# EAGLE board JTAGKey_V1 (EAGLE 5.11)
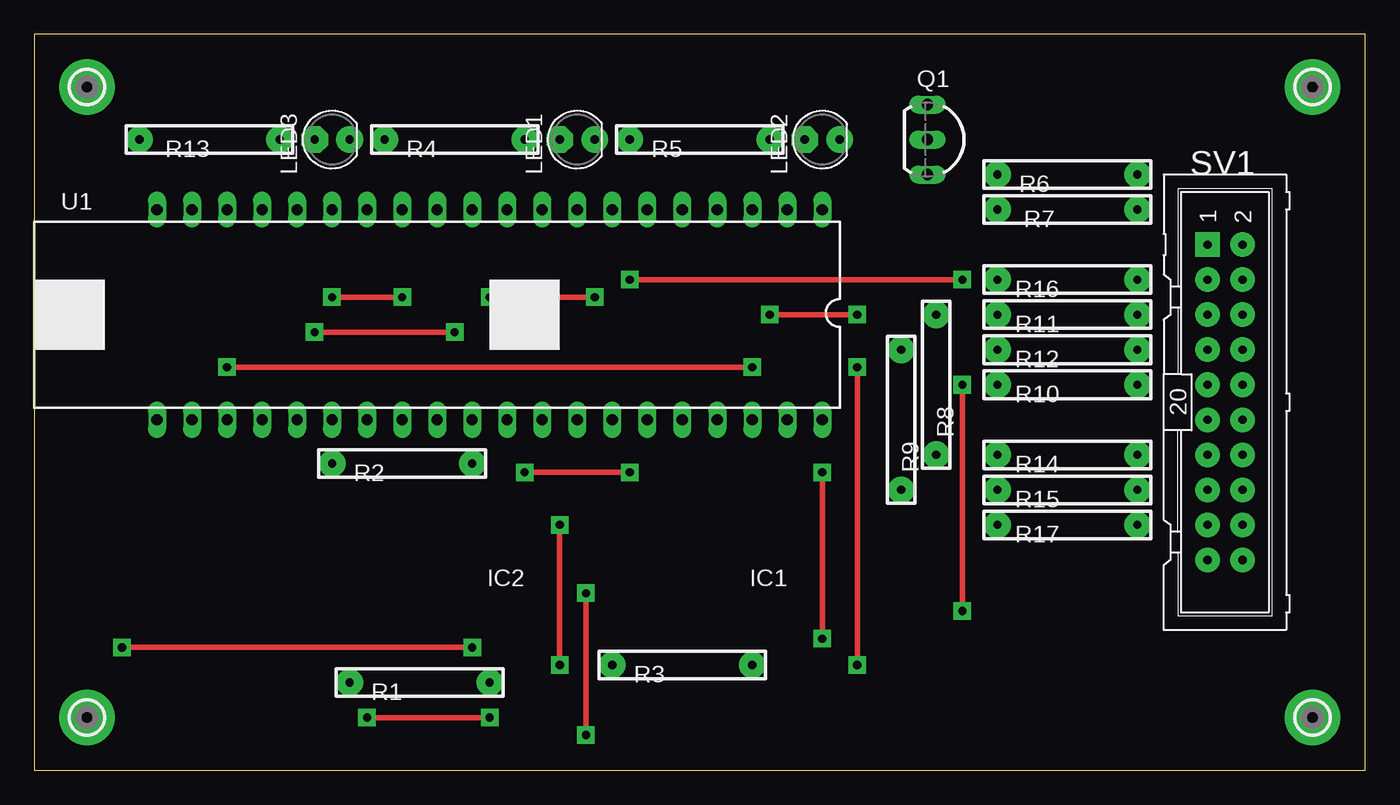
[diagram p0: board, top side]
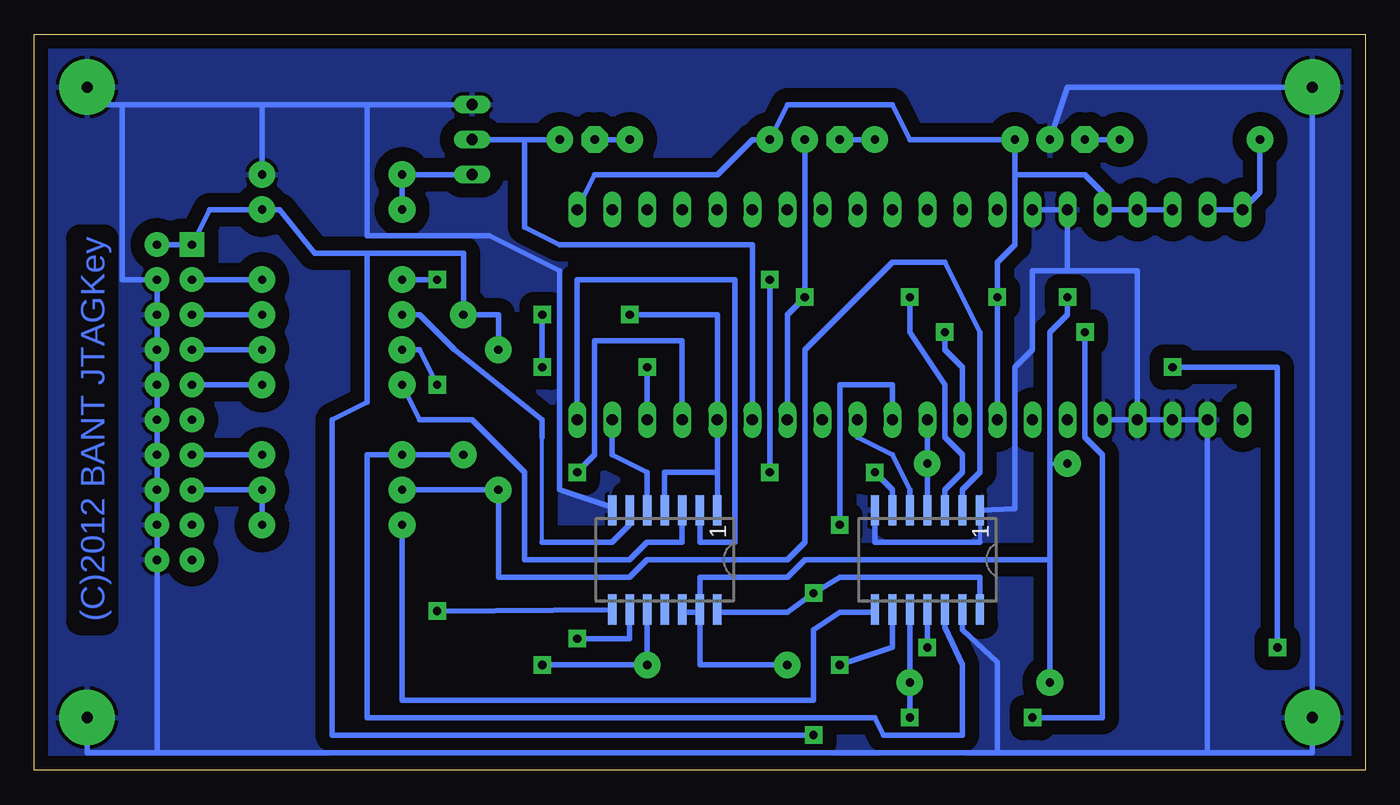
[diagram p1: board, bottom side, seen from below]

Size 96.52 x 53.34 mm. Coordinates in mm from the lower left corner, seen from the top.
Outline: 0,0 96.52,0 96.52,53.34 0,53.34 0,0
Copper layers (1*16): Top 0.035mm / dielectric 1.5mm / Bottom 0.035mm
Design rules "default": minimum track width 10mil, minimum drill 24mil, track to track 8mil, track to pad 8mil, pad to pad 8mil, via to via 8mil, smd to smd 8mil, copper to edge 40mil, drill to drill 8mil, minimum pad ring 10mil, minimum via ring 8mil, stop-mask expansion 4mil, vias tented up to drill 0mil, thermal gap 10mil

## Footprints (pad centres in the part's own frame; a part is rotated, then mirrored left to right if it is on the bottom)
SOP14 = smd 0.6 x 2.2: 1 -3.175,-3.6; 2 -1.905,-3.6; 3 -0.635,-3.6; 4 0.635,-3.6; 5 1.905,-3.6; 6 3.175,-3.6; 7 4.445,-3.6; 8 4.445,3.6; 9 3.175,3.6; 10 1.905,3.6; 11 0.635,3.6; 12 -0.635,3.6; 13 -1.905,3.6; 14 -3.175,3.6
LED_3MM_VIRT_2 = drill 0.6 pad 1.93 octagon: A 0,1.27 | drill 0.6 pad 1.93 round: K 0,-1.27
PAD-2.1 = drill 0.8 pad 4 round: B2,1 0,0
TO92 = drill 0.813 long: B 2.54,0; C 0,0; E -2.54,0
R_0.125W_4 = drill 0.6 pad 1.93 round: 1 -5.08,0; 2 5.08,0
ML20W = drill 0.6 pad 1.778 square: 1 -11.43,-1.27 | drill 0.6 pad 1.778 round: 2 -11.43,1.27; 3 -8.89,-1.27; 4 -8.89,1.27; 5 -6.35,-1.27; 6 -6.35,1.27; 7 -3.81,-1.27; 8 -3.81,1.27; 9 -1.27,-1.27; 10 -1.27,1.27; 11 1.27,-1.27; 12 1.27,1.27; 13 3.81,-1.27; 14 3.81,1.27; 15 6.35,-1.27; 16 6.35,1.27; 17 8.89,-1.27; 18 8.89,1.27; 19 11.43,-1.27; 20 11.43,1.27
DIL40-AE-FT2232 = drill 0.813 long: 1 -24.13,-7.62; 2 -21.59,-7.62; 3 -19.05,-7.62; 4 -16.51,-7.62; 5 -13.97,-7.62; 6 -11.43,-7.62; 7 -8.89,-7.62; 8 -6.35,-7.62; 9 -3.81,-7.62; 10 -1.27,-7.62; 11 1.27,-7.62; 12 3.81,-7.62; 13 6.35,-7.62; 14 8.89,-7.62; 15 11.43,-7.62; 16 13.97,-7.62; 17 16.51,-7.62; 18 19.05,-7.62; 19 21.59,-7.62; 20 24.13,-7.62; 21 24.13,7.62; 22 21.59,7.62; 23 19.05,7.62; 24 16.51,7.62; 25 13.97,7.62; 26 11.43,7.62; 27 8.89,7.62; 28 6.35,7.62; 29 3.81,7.62; 30 1.27,7.62; 31 -1.27,7.62; 32 -3.81,7.62; 33 -6.35,7.62; 34 -8.89,7.62; 35 -11.43,7.62; 36 -13.97,7.62; 37 -16.51,7.62; 38 -19.05,7.62; 39 -21.59,7.62; 40 -24.13,7.62

## Placement (x,y rotation side)
IC1  74VHC125  [SOP14]  50.16,15.24 180 bottom
IC2  74VHC125  [SOP14]  31.11,15.24 180 bottom
LED1  YELLOW  [LED_3MM_VIRT_2]  39.37,45.72 90 top
LED2  GREEN  [LED_3MM_VIRT_2]  57.15,45.72 90 top
LED3  RED  [LED_3MM_VIRT_2]  21.59,45.72 90 top
MT1  MOUNT11  [PAD-2.1]  3.81,3.81 0 top
MT2  MOUNT2  [PAD-2.1]  92.71,3.81 0 top
MT3  MOUNT3  [PAD-2.1]  92.71,49.53 0 top
MT4  MOUNT4  [PAD-2.1]  3.81,49.53 0 top
Q1  2SC1815  [TO92]  64.77,45.72 270 top
R1  22K  [R_0.125W_4]  27.94,6.35 180 top
R2  22K  [R_0.125W_4]  26.67,22.23 180 top
R3  22K  [R_0.125W_4]  46.99,7.62 180 top
R4  1K  [R_0.125W_4]  30.48,45.72 180 top
R5  1K  [R_0.125W_4]  48.26,45.72 180 top
R6  22K  [R_0.125W_4]  74.93,43.18 180 top
R7  15K  [R_0.125W_4]  74.93,40.64 0 top
R8  22K  [R_0.125W_4]  65.41,27.94 90 top
R9  22K  [R_0.125W_4]  62.87,25.4 90 top
R10  82  [R_0.125W_4]  74.93,27.94 0 top
R11  82  [R_0.125W_4]  74.93,33.02 0 top
R12  82  [R_0.125W_4]  74.93,30.48 0 top
R13  1K  [R_0.125W_4]  12.7,45.72 180 top
R14  82  [R_0.125W_4]  74.93,22.86 0 top
R15  82  [R_0.125W_4]  74.93,20.32 0 top
R16  82  [R_0.125W_4]  74.93,35.56 0 top
R17  82  [R_0.125W_4]  74.93,17.78 0 top
SV1  JTAG  [ML20W]  86.36,26.67 270 top
U1  AE-FT2232  [DIL40-AE-FT2232]  33.02,33.02 180 top

## Library data of the parts
IC1 IC2 = ic74xx
LED1-LED3 MT1-MT4 Q1 R1-R17 = MyLib
SV1 = con-harting-ml
U1 = akizuki

## Nets
GND: IC1.7 IC2.1 IC2.7 IC2.13 LED3.K MT1.B2,1 MT2.B2,1 MT3.B2,1 MT4.B2,1 Q1.E R6.1 SV1.4 SV1.6 SV1.8 SV1.10 SV1.12 SV1.14 SV1.16 SV1.18 SV1.20 U1.14 U1.15 U1.22 U1.23 U1.24 U1.25
N$1: Q1.B R6.2 R7.1
N$2: R13.2 U1.19 U1.20
N$3: IC2.5 U1.32
N$4: LED3.A R13.1
N$5: IC1.3 R10.1
N$6: IC1.6 R11.1
N$7: IC1.8 R12.1
N$8: IC2.12 R8.1 R14.1
N$9: IC2.2 R9.1 R15.1
N$10: IC2.6 R16.1
N$11: IC2.9 U1.31
N$12: IC2.8 R17.1
N$13: LED1.A R4.1
N$14: LED2.A R5.1
N$15: IC2.4 R2.1 U1.30
N$16: IC2.10 R1.1 U1.29
N$17: R10.2 SV1.9
N$18: R11.2 SV1.5
N$19: R12.2 SV1.7
N$20: R14.2 SV1.13
N$21: R15.2 R17.2 SV1.15
N$22: R16.2 SV1.3
NOE: IC1.1 IC1.4 IC1.10 R3.1 U1.36
NSRST_IN: IC2.3 LED1.K U1.34
NTVCC: LED2.K Q1.C U1.35
TCK: IC1.2 U1.40
TDI: IC1.5 U1.39
TDO: IC2.11 U1.38
TMS: IC1.9 U1.37
VCC: IC1.14 IC2.14 R7.2 R8.2 R9.2 SV1.1 SV1.2
VCCUSB: U1.21
VDD: IC1.12 IC1.13 R1.2 R2.2 R3.2 R4.2 R5.2 U1.1 U1.16 U1.17 U1.18 U1.28

## Tracks (layer width: path | path; a pad name or v marks a point on that pad's centre or on a via)
GND
  Bottom 0.254: IC2.13 29.21,11.43 | 54.61,19.05 IC1.7
  Bottom 0.305: IC2.1 27.94,16.51
  Bottom 0.406: LED3.K 21.59,49.53 MT4.B2,1 MT1.B2,1 3.81,1.27 11.43,1.27 | U1.24 U1.23 U1.22 11.43,1.27 | U1.14 U1.15 21.59,36.2 | U1.24 16.51,36.2 21.59,36.2 | IC2.1 25.4,18.95 25.4,29.21 24.13,30.48 24.13,36.2 21.59,36.2 | 27.94,16.51 35.56,16.51 IC2.7 | U1.24 U1.25 | 26.67,1.27 26.67,7.83 29.21,10.16 IC2.13 | 11.43,1.27 87.63,1.27 | 87.63,1.27 92.71,1.27 MT2.B2,1 | MT3.B2,1 92.71,48.26 90.17,48.26 | 80.01,48.26 R6.1 | 80.01,48.26 72.39,48.26 | 72.39,48.26 Q1.E | 54.61,19.05 58.42,20.32 58.42,36.2 63.5,38.73 72.39,38.73 72.39,48.26 | 90.17,48.26 80.01,48.26 | 90.17,48.26 90.17,35.56 SV1.4 SV1.6 SV1.8 SV1.10 SV1.12 SV1.14 SV1.16 SV1.18 SV1.20 87.63,1.27
  pour Bottom (isolate 1.016): 0,53.34 0,0 96.52,0 96.52,2.54 96.52,53.34
N$1
  Bottom 0.406: R7.1 R6.2 Q1.B
N$2
  Bottom 0.406: U1.19 U1.20 7.62,41.91 R13.2
N$3
  Bottom 0.254: IC2.5 33.02,19.05
  Bottom 0.406: 33.02,19.05 33.02,20.32 34.29,22.86 36.83,24.13 U1.32
N$4
  Bottom 0.406: R13.1 LED3.A
N$5
  Bottom 0.406: IC1.3 49.53,16.51 52.07,16.51 53.34,15.24 60.96,15.24 60.96,21.59 64.77,25.4 68.58,25.4 R10.1
N$6
  Bottom 0.305: 53.34,17.78 IC1.6 | 59.69,16.51 59.69,24.13
  Bottom 0.406: 53.34,17.78 54.61,16.51 59.69,16.51 | 59.69,24.13 59.69,25.4 66.04,30.48 68.58,33.02 R11.1
N$7  (via drill 0.6 pad 1.27)
  Top 0.406: v67.31,11.53 v67.31,27.94
  Bottom 0.406: IC1.8 v67.31,11.53 | v67.31,27.94 68.58,30.48 R12.1
N$8
  Bottom 0.406: IC2.12 30.48,10.37 29.21,7.62 29.21,6.35 29.21,2.54 34.92,2.54 35.56,3.81 72.39,3.81 72.39,22.86 R14.1 R8.1
N$9
  Bottom 0.305: IC2.2 29.21,19.05
  Bottom 0.406: 29.21,19.05 29.21,20.32 27.94,21.59 27.94,31.75 30.48,36.83 34.29,36.83 40.64,30.48 40.64,16.51 41.91,15.24 52.07,15.24 53.34,13.97 62.87,13.97 R9.1 R15.1
N$10  (via drill 0.6 pad 1.27)
  Top 0.406: v35.56,21.59 v43.18,21.59 | v43.18,35.56 v67.31,35.56
  Bottom 0.406: IC2.6 34.29,20.32 v35.56,21.59 | v43.18,21.59 v43.18,35.56 | v67.31,35.56 R16.1
N$11  (via drill 0.6 pad 1.27)
  Top 0.406: v38.1,7.62 v38.1,17.78
  Bottom 0.406: U1.31 34.29,27.94 38.1,27.94 v38.1,17.78 | v38.1,7.62 34.29,8.89 IC2.9
N$12
  Bottom 0.254: 35.56,11.43 IC2.8
  Bottom 0.406: 35.56,11.43 38.1,11.43 40.01,10.16 40.01,5.08 69.85,5.08 R17.1
N$13
  Bottom 0.406: R4.1 LED1.A
N$14
  Bottom 0.406: R5.1 LED2.A
N$15
  Bottom 0.406: IC2.4 R2.1 U1.30
N$16  (via drill 0.6 pad 1.27)
  Top 0.406: v20.32,31.75 v30.48,31.75 | v24.13,3.81 v33.02,3.81
  Bottom 0.406: IC2.10 R1.1 v33.02,3.81 | v30.48,31.75 30.48,30.48 29.21,29.21 U1.29 | v20.32,31.75 20.32,24.13 19.05,22.86 19.05,3.81 v24.13,3.81
N$17
  Bottom 0.406: R10.2 SV1.9
N$18
  Bottom 0.406: R11.2 SV1.5
N$19
  Bottom 0.406: R12.2 SV1.7
N$20
  Bottom 0.406: R14.2 SV1.13
N$21
  Bottom 0.406: SV1.15 R15.2 R17.2
N$22
  Bottom 0.406: R16.2 SV1.3
NOE  (via drill 0.6 pad 1.27)
  Top 0.406: v59.69,33.02 v53.34,33.02 | v59.69,7.62 v59.69,29.21
  Bottom 0.406: 46.99,21.59 IC1.1 | 46.99,21.59 50.8,21.59 IC1.4 | IC1.10 R3.1 v59.69,7.62 | v59.69,29.21 v59.69,33.02 | v53.34,33.02 46.99,33.02 U1.36 46.99,21.59
NSRST_IN  (via drill 0.6 pad 1.27)
  Top 0.406: v33.02,34.29 v40.64,34.29
  Bottom 0.305: IC2.3 30.48,19.05
  Bottom 0.406: U1.34 41.91,33.02 v40.64,34.29 LED1.K | 30.48,19.05 30.48,20.32 29.21,21.59 29.21,22.86 30.48,24.13 30.48,27.94 33.02,31.75 v33.02,34.29
NTVCC
  Bottom 0.406: U1.35 44.45,38.1 58.42,38.1 60.96,39.37 60.96,45.72 | 60.96,45.72 LED2.K | 60.96,45.72 Q1.C
TCK
  Bottom 0.406: U1.40 57.15,35.56 45.72,35.56 45.72,16.51 48.26,16.51 IC1.2
TDI
  Bottom 0.406: U1.39 54.61,22.86 52.07,21.59 IC1.5
TDO  (via drill 0.6 pad 1.27)
  Top 0.406: v13.97,29.21 v52.07,29.21 | v6.35,8.89 v31.75,8.89
  Bottom 0.406: v52.07,29.21 U1.38 | v13.97,29.21 6.35,29.21 v6.35,8.89 | v31.75,8.89 IC2.11
TMS  (via drill 0.6 pad 1.27)
  Top 0.406: v57.15,9.53 v57.15,21.59
  Bottom 0.406: U1.37 49.53,31.11 55.88,31.11 55.88,22.86 v57.15,21.59 | v57.15,9.53 53.34,9.53 IC1.9
VCC  (via drill 0.6 pad 1.27)
  Top 0.406: v40.01,12.83 v40.01,2.54
  Bottom 0.254: 46.99,11.43 IC1.14
  Bottom 0.406: 46.99,11.43 41.91,11.43 v40.01,12.83 38.1,13.97 27.94,13.97 IC2.14 | R9.2 62.87,33.02 R8.2 65.41,37.47 72.39,37.47 | SV1.2 SV1.1 83.82,40.64 R7.2 78.74,40.64 76.2,37.47 72.39,37.47 | 72.39,37.47 72.39,26.67 74.93,25.4 74.93,2.54 v40.01,2.54
VDD  (via drill 0.6 pad 1.27)
  Top 0.406: v21.59,34.29 v26.67,34.29
  Bottom 0.254: 49.53,11.43 IC1.12
  Bottom 0.305: 22.86,22.23 R2.2
  Bottom 0.406: U1.18 U1.17 U1.16 19.05,41.91 20.32,43.18 25.4,43.18 | U1.1 55.88,43.18 46.99,43.18 44.45,45.72 R5.2 41.91,48.26 34.29,48.26 33.02,45.72 R4.2 25.4,43.18 | 48.26,11.43 49.53,11.43 | R3.2 48.26,7.62 48.26,11.43 | 48.26,11.43 IC1.13 48.26,13.97 41.91,13.97 40.64,15.24 22.86,15.24 | 22.86,15.24 22.86,22.23 22.86,31.75 21.59,33.02 v21.59,34.29 | R1.2 22.86,15.24 | U1.28 v26.67,34.29 26.67,36.83 25.4,38.1 25.4,43.18

## Text on the board
Bottom: (C)2012 BANT JTAGKey